# Altium PCB RiskChemi_Sensors_V2.11.PcbDoc
Units mil, origin at the board's own origin, x right, y up, seen from the top; angles counter-clockwise.
Board outline 6000 x 4000 mil, 2 copper layers (Top Layer, Bottom Layer); 85 components, 52 nets, 284 pads, 679 vias.
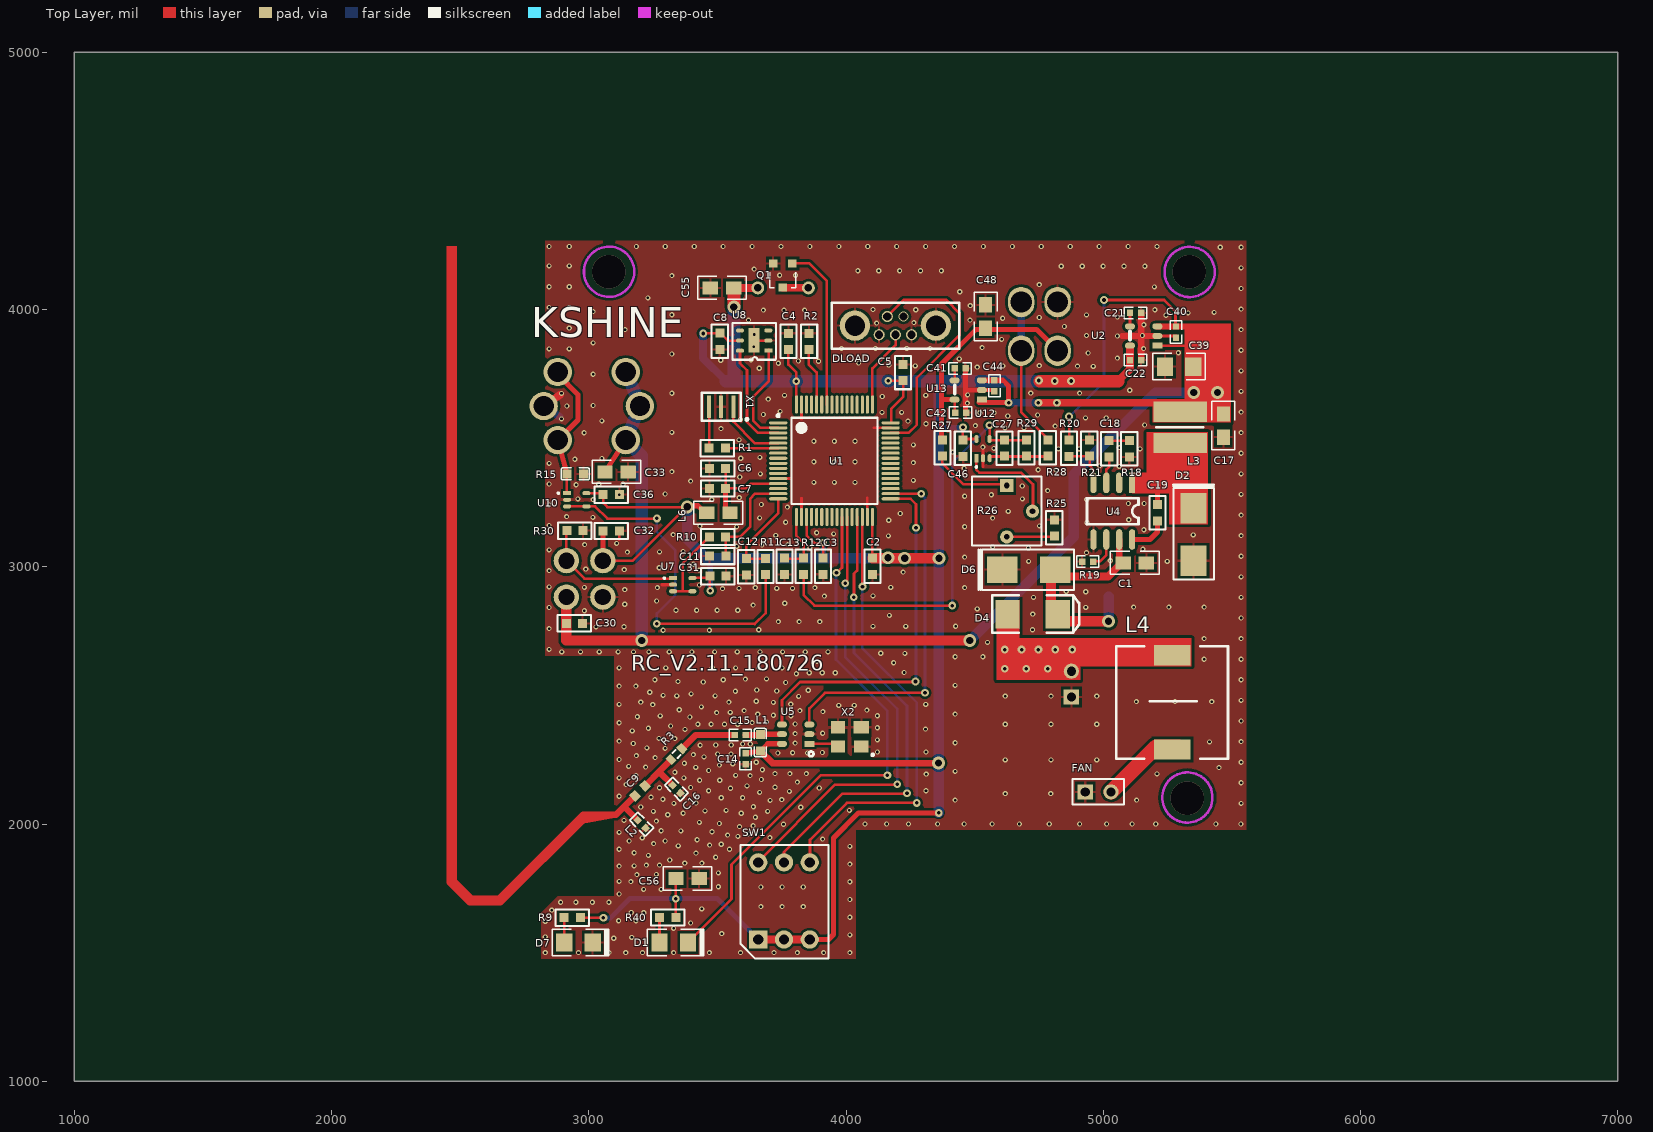
[diagram p0: Top Layer view]
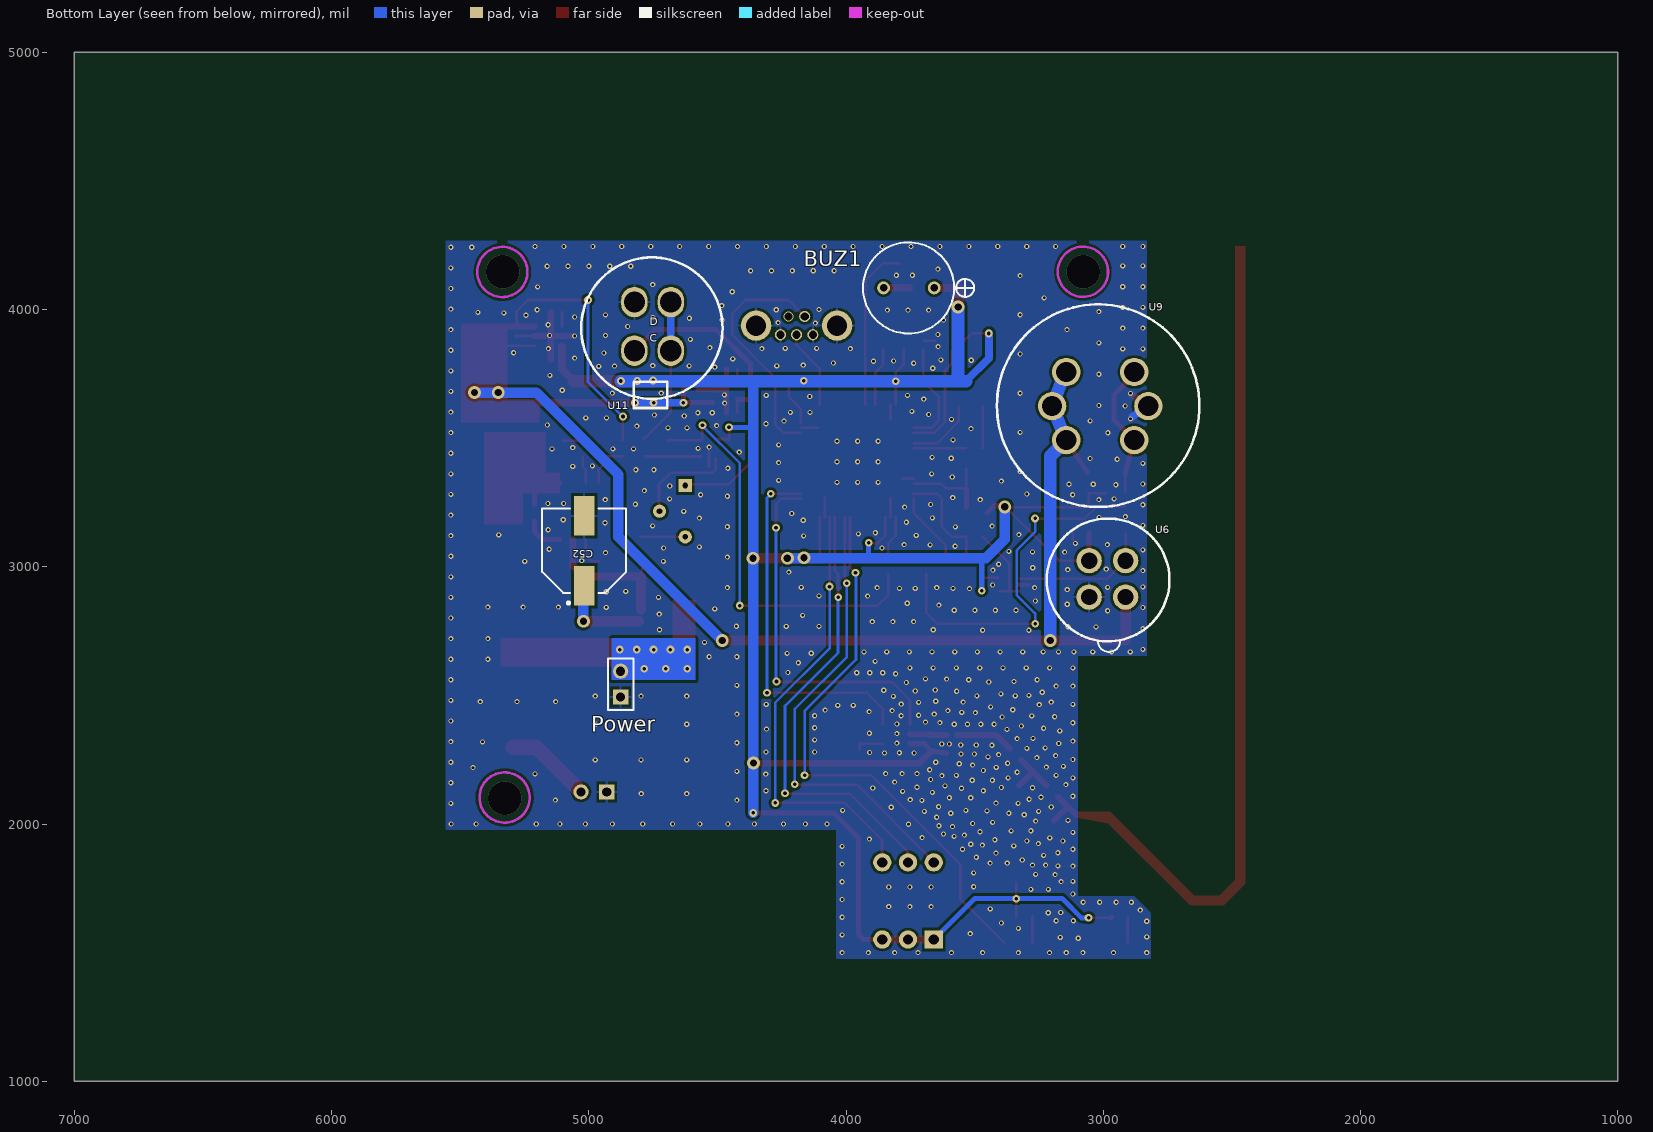
[diagram p1: Bottom Layer view, seen from below]

## Layer stack, top to bottom
Top Solder: solder mask 0.4, Solder Resist, Dk 3.5
Top Layer: signal copper 1.4
Dielectric 1: dielectric 12.6, FR-4, Dk 4.8
Bottom Layer: signal copper 1.4
Bottom Solder: solder mask 0.4, Solder Resist, Dk 3.5

## Board outline
1000,1000 7000,1000 7000,5000 1000,5000

## Design rules (kind name [scope] priority, off if disabled: settings)
Clearance [All] p1: gap=3
ComponentClearance [All] p1: gap=0 collisioncheckmode=3 verticalgap=0 showdistances=FALSE
MinimumSolderMaskSliver [All] p1 off: minsoldermaskwidth=10
PolygonConnect PolygonConnect_1 [IsVia] p1: connectstyle=Direct reliefconductorwidth=10 reliefentries=2 polygonreliefangle="90 Angle" airgapwidth=10
PolygonConnect [All] p2: connectstyle=Relief reliefconductorwidth=10 reliefentries=4 polygonreliefangle="90 Angle" airgapwidth=10
RoutingVias [All] p1: holewidth=28 width=50 viastyle="Through Hole" minholewidth=28 minwidth=50 maxholewidth=28 maxwidth=50
SilkToSilkClearance [All] p1 off: silktosilkclearance=10
SilkToSolderMaskClearance [IsPad] p1 off: minsilkscreentomaskgap=10 clearancetoexposedcopper=TRUE
SolderMaskExpansion [All] p1: expansion=4
Width [All] p1: maxlimit=100 minlimit=10 preferedwidth=10
26 further rules are at their usual default settings.

## Components (designator, comment, footprint, x,y, rotation, side; value= is the part's Value field where it differs from the comment)
BUZ1 "BUZZER 0905 through hole" BUZ0905 3755,4084 r180 bottom
C1 "10uF" 0805 5078,3015 r0 top
C2 "100nF" 0603 4099,3063 r0 top
C3 "100nF" 0603 3906,3063 r0 top
C4 "100nF" 0603 3781,3815 r180 top
C5 "100nF" 0603 4226,3694 r180 top
C6 "100nF" 0603 3562,3386 r270 top
C7 "1uF" 0603 3562,3309 r270 top
C8 "100nF" 0603 3505,3938 r0 top
C9 "0.8pF/25V" 1608[0603] 3199,2129 r225 top
C11 "100nF" 0603 3440,3037 r90 top
C12 "100nF" 0603 3608,3061 r0 top
C13 "100nF" 0603 3757,3063 r0 top
C14 "100nF" 0402#1 3606,2360 r0 top
C15 "82pF" 0402#1 3483,2342 r90 top
C16 "0.3pF/25V" 0402#1 3263,2208 r45 top
C17 "22uF" 0805 5467,3594 r270 top
C18 "150pF" 0603 5019,3520 r0 top
C19 "100nF" 0603 5207,3271 r0 top
C21 "NULL" 0402#1 5019,3983 r90 top
C22 "1uF" 0402#1 5019,3799 r90 top
C27 "1uF" 0603 4620,3399.95 r180 top
C30 "1uF" 0603 2883,2776 r90 top
C31 "100nF" 0603 3441,2959 r90 top
C32 "100nF" 0603 3026,3135 r90 top
C33 "10uF" 0805 3063,3369 r0 top
C36 "100nF" 0603 3026,3276 r90 top
C39 "22uF" 1206 5350,3778 r180 top
C40 "100nF" 0402#1 5279,4019 r0 top
C41 "22nF" 0402#1 4337,3767 r90 top
C42 "1uF" 0402#1 4339,3595 r90 top
C44 "100nF" 0402#1 4573,3810 r0 top
C46 "100nF" 0603 4450,3522 r0 top
C48 "10uF" 0805 4543,3928 r90 top
C52 "47uF" cap_pol_8*10.2 5018,3062 r90 bottom
C55 "10uF" 0805 3563,4084 r180 top
C56 "10uF" 0805 3339,1788 r0 top
D1 "LED" 1206_LED 3328,1542 r0 top
D2 "B290-13-F" B290 5351,3228 r270 top
D4 "1N4007" 6032_pol 4728,2814 r180 top
D6 "SMAJ36CA" B290 4608,2989 r0 top
D7 "LED_POWER" 1206_LED 2958,1542 r0 top
DLOAD "USB Connector" Mini_USB 4192,3902 r90 top
FAN "Header 2" HDR1X2 4930,2125 r0 top
L1 "100nH" 0603C 3668,2318 r0 top
L2 "Inductor" 0402#2 3206,1999 r45 top
L3 "15uH" "4*4 Inductor" 5291,3542 r180 top
L4 "22uH" 10*10Inductor 5269,2290 r0 top
L6 "10uH" 0805 3549,3210 r180 top
Power "Header 2" HDR1X2 4876,2494 r90 bottom
Q1 "2N7002" 2N7002 3756,4133 r180 top
R1 "100R" 0603 3561,3465 r270 top
R2 "10K" 0603 3861,3815 r180 top
R3 "0R" J1-0603 3341,2272 r225 top
R9 "510R" 0603 2997,1640 r270 top
R10 "1M" 0603 3562,3120 r270 top
R11 "1M" 0603 3683,3062 r0 top
R12 "1M" 0603 3831,3063 r0 top
R15 "Res1" 0603C 2946,3362 r90 top
R18 "100k" 0603 5097,3520 r0 top
R19 "200K" 0402#1 5046,3024 r270 top
R20 "205K" 0603 4863,3522 r0 top
R21 "40.2K" 0603 4950,3400 r180 top
R25 "5.1K" 0603 4814,3090 r180 top
R26 "3362P_2K_adj_res" res_adj 4625,3316 r0 top
R27 "5.1K" 0603 4371,3523 r0 top
R28 "1K" 0603 4789,3401 r180 top
R29 "100K" 0603 4697,3523 r0 top
R30 "10K" 0603 2885,3136 r90 top
R40 "510R" 0603 3368,1641 r270 top
SW1 "HRO韩国韩荣拨码开关" SW_6P_HRO 3659,1551 r90 top
U1 "STM32F103RBT6" LQFP64_N 3955,3412 r0 top
U2 "RT9013-33GB" SOT-23-5 5163,3899 r90 top
U4 "MP2565DN" so-8 5112,3326 r270 top
U5 "CMT2119A" SOT23-6 3810,2351 r90 top
U6 "TGS2602" "Gas Sensor TGS2602 Slot" 2913,2882 r0 bottom
U7 "LMV321SQ3T2G" SC-70-5 3328,2956 r0 top
U8 "SHT20" SHT20 3698,3840 r180 top
U9 "Gas Sensor 2M010" "Gas Sensor 2M010 Slot" 3144,3757 r180 bottom
U10 "LMV321SQ3T2G" SC-70-5 2916,3286 r0 top
U11 "WS101" Gas_Sensor_WS101_Slot 4752.45,3921 r180 bottom
U12 "LMV321SQ3T2G" SC-70-5 4507,3422 r90 top
U13 "RT9193-30GB" SOT-23-5 4481,3689 r90 top
X1 "8M smd" 8Mhz_XTAL 3562,3622 r180 top
X2 "XTAL_Negative" XTAL3225 3969,2376 r0 top

## Footprints (in the part's own frame and the unit in brackets; to place one, negate y for a bottom-side part, rotate by r counter-clockwise, add the part's x,y. Pads: shape width x height; smd on the part's side, far side on the other; paste and mask are expansions set on the pad)
2N7002 [mm]
  rect 0.85x0.8 smd: 1(0.047,1.221) 2(-0.903,-1.179) 3(0.997,-1.179)
  silkscreen extent -1.23,-0.28 1.32,1.22
"4*4 Inductor" [mm]
  rect 5.3x2 smd: 1(-0.203,-1.548) 2(-0.203,1.552)
  silkscreen extent -2.46,0 2.13,0
8Mhz_XTAL [mm]
  rect 0.4x2.2 smd: 1(0,0) 2(1.2,0) 3(2.4,0)
  silkscreen extent -1.45,-1.39 3.13,1.4
10*10Inductor [mm]
  rect 3.6x2 smd: 1(0,0) 2(0,9.3)
  silkscreen extent -5.55,-0.92 5.49,10.19
0402#1 [mil]
  rect 25x25 smd: 1(3.98,-127.99) 2(3.98,-84.98)
  silkscreen extent -19,-150 26,-63
0402#2 [mil]
  rect 25x25 smd: 1(-0.02,-20.99) 2(-0.02,22.02)
  silkscreen extent -23,-43 22,44
0603 [mil]
  rect 35x35 smd: 1(4.25,-92.76) 2(4.25,-29.76)
  silkscreen extent -27,-126 36,4
0603C [mil]
  rect 35x35 smd: 1(-0.83,30.88) 2(-0.83,-34.12)
  silkscreen extent -24,-57 23,54
0805 [mil]
  rect 60x50 smd: 1(90,0) 2(0,0)
  silkscreen extent -50,-45 140,45
1206 [mm]
  rect 1.6x1.8 smd: 1(0,0) 2(2.8,0)
  silkscreen extent -1.2,-1.3 4,1.3
1206_LED [mm]
  rect 1.6x1.8 smd: 1(-1.344,-0.081) 2(1.456,-0.081)
  silkscreen extent -2.54,-1.38 2.98,1.22
1608[0603] [mm] "Chip Capacitor, Body 1.6x0.8mm, IPC High Density"
  rect 0.8x0.9 smd: 1(-0.7,0) 2(0.7,0)
  body extent -0.87,-0.47 0.87,0.47, height 1.3
6032_pol [mm]
  rect 2.4x2.8 smd: 1(2.538,-0.041) 2(-2.422,-0.041)
  silkscreen extent -4.52,-1.89 4.06,1.81
B290 [mm]
  rect 3x2.6 smd: 1(5.2,0) 2(0,0)
  silkscreen extent -2.34,-2 7.06,2
BUZ0905 [mm] "Buzzer"
  round 1.27 hole 0.75: 1(2.485,0.002) 2(-2.515,0.002)
  silkscreen extent -4.55,-4.5 6.43,4.5
cap_pol_8*10.2 [mm]
  rect 3.9x2.05 smd: 1(-3.443,-0.001) 2(3.457,-0.001)
  silkscreen extent -5.27,-4.15 4.16,4.15
"Gas Sensor 2M010 Slot" [mm]
  round 2.8 hole 2: 1(0,0) 2(-1.391,-3.36) 3(0,-6.719) 4(6.719,-6.719) 5(8.109,-3.36) 6(6.719,0)
  silkscreen extent -6.84,-13.32 13.16,6.68
"Gas Sensor TGS2602 Slot" [mm]
  round 2.5 hole 1.6: 1(0,0) 2(0,-3.6) 3(3.6,-3.6) 4(3.6,0)
  silkscreen extent -4.33,-7.76 7.8,5.42
Gas_Sensor_WS101_Slot [mm]
  oval 2.6x3 hole 2.1: 1(-1.783,2.742) 2(-1.783,-2.058) 3(1.817,-2.058) 4(1.817,2.742)
  silkscreen extent -7.04,-7.72 6.93,7.16
HDR1X2 [mm] "Connector; Header; 2 Position"
  rect 1.5x1.5 hole 0.9: 1(0,0)
  round 1.5 hole 0.9: 2(2.54,0)
  silkscreen extent -1.27,-1.27 3.81,1.27
J1-0603 [mm] "Chip Resistor, Body 1.6x0.8mm, IPC High Density"
  rect 0.7x0.9 smd: 1(-0.75,0) 2(0.75,0)
  silkscreen extent -0.2,-0.35 0.2,0.35, body extent -0.85,-0.47 0.85,0.47, height 0.9
LQFP64_N [mm] "Thin QFP, 64-Leads, Body 10x10mm, Pitch 0.5mm, IPC Medium Density"
  oval 1.8x0.3 smd: 1(-5.55,3.75) 2(-5.55,3.25) 3(-5.55,2.75) 4(-5.55,2.25) 5(-5.55,1.75) 6(-5.55,1.25) 7(-5.55,0.75) 8(-5.55,0.25) 9(-5.55,-0.25) 10(-5.55,-0.75) 11(-5.55,-1.25) 12(-5.55,-1.75) 13(-5.55,-2.25) 14(-5.55,-2.75) 15(-5.55,-3.25) 16(-5.55,-3.75) 33(5.55,-3.75) 34(5.55,-3.25) 35(5.55,-2.75) 36(5.55,-2.25) 37(5.55,-1.75) 38(5.55,-1.25) 39(5.55,-0.75) 40(5.55,-0.25) 41(5.55,0.25) 42(5.55,0.75) 43(5.55,1.25) 44(5.55,1.75) 45(5.55,2.25) 46(5.55,2.75) 47(5.55,3.25) 48(5.55,3.75)
  oval 0.3x1.8 smd: 17(-3.75,-5.55) 18(-3.25,-5.55) 19(-2.75,-5.55) 20(-2.25,-5.55) 21(-1.75,-5.55) 22(-1.25,-5.55) 23(-0.75,-5.55) 24(-0.25,-5.55) 25(0.25,-5.55) 26(0.75,-5.55) 27(1.25,-5.55) 28(1.75,-5.55) 29(2.25,-5.55) 30(2.75,-5.55) 31(3.25,-5.55) 32(3.75,-5.55) 49(3.75,5.55) 50(3.25,5.55) 51(2.75,5.55) 52(2.25,5.55) 53(1.75,5.55) 54(1.25,5.55) 55(0.75,5.55) 56(0.25,5.55) 57(-0.25,5.55) 58(-0.75,5.55) 59(-1.25,5.55) 60(-1.75,5.55) 61(-2.25,5.55) 62(-2.75,5.55) 63(-3.25,5.55) 64(-3.75,5.55)
  silkscreen extent -5.67,-4.25 4.25,4.57, body extent -5,-5 5,5, height 1.6
Mini_USB [mm] "180 degree"
  round 1.1 hole 0.8: 1(0,-1.6) 3(0,0) 4(1.8,0.8) 5(0,1.6)
  round 1 hole 0.8: 2(1.8,-0.8)
  round 3 hole 2: 6(0.9,4) 7(0.9,-4)
  silkscreen extent -1.39,-6.32 3.15,6.3
res_adj [mm]
  rect 1.3x1.3 hole 0.55: 1(0,0)
  round 1.3 hole 0.55: 2(2.54,-2.54) 3(0,-5.08)
  silkscreen extent -3.44,-5.95 3.45,0.9
SC-70-5 [mm]
  rect 0.8x0.4 smd: 1(0,0)
  oval 0.8x0.4 smd: 2(0,-0.65) 3(0,-1.3) 4(1.9,-1.3) 5(1.9,0)
  silkscreen extent -0.91,-0.05 -0.81,0.05
SHT20 [mm]
  rect 0.8x0.4 smd: 1(0,0)
  oval 0.8x0.4 smd: 2(0,-1) 3(0,-2) 4(2.8,-2) 5(2.8,-1) 6(2.8,0)
  rect 1.1x2.4 smd: 2(1.402,-1.019)
  silkscreen extent -0.75,-2.72 3.53,0.89
so-8 [mil]
  rect 80x24 smd: 1(0,0)
  oval 80x24 smd: 2(0,-50) 3(0,-100) 4(0,-150) 5(220,-150) 6(220,-100) 7(220,-50) 8(220,0)
  silkscreen extent 60,-175 160,25
SOT23-6 [mm]
  rect 0.6x1 smd: 1(-0.998,-1.204)
  oval 0.6x1 smd: 2(-0.048,-1.204) 3(0.902,-1.204) 4(0.902,1.496) 5(-0.048,1.496) 6(-0.998,1.496)
  silkscreen extent -2.23,-1.62 -1.76,-1.14, body extent -1.5,-1.3 1.4,1.5, height 1.2
SOT-23-5 [mm]
  rect 0.6x1 smd: 1(-0.995,-1.201)
  oval 0.6x1 smd: 2(-0.045,-1.201) 3(0.905,-1.201) 4(0.905,1.499) 5(-0.995,1.499)
  silkscreen extent -0.4,1.5 0.4,1.5, body extent -1.5,-1.3 1.4,1.5, height 1.2
SW_6P_HRO [mm]
  rect 1.8x1.8 hole 1: 1(0,0)
  round 1.8 hole 1: 2(0,-2.54) 3(0,-5.08) 4(7.62,-5.08) 5(7.62,-2.54) 6(7.62,0)
  silkscreen extent -1.89,-6.93 9.34,1.74
XTAL3225 [mm]
  rect 1.4x1.2 smd: 1(0,-1.9) 2(2.3,-1.9) 4(0,0)
  rect 1.5x1.2 smd: 3(2.3,0)
  silkscreen extent 3.32,-2.82 3.52,-2.62

## Part data
BUZ1: library part BUZZER, "Buzzer"
C1 C17: library part Cap, "Capacitor,50V"
C2 C3 C4 C5 C6 C7 C8 C11 C12 C13 C14 C15 C16 C18 C19 C21 C22 C27 C30 C31 C32 C33 C36 C39 C40 C41 C42 C44 C46 C48 C55 C56: library part Cap, "Capacitor"
C9: library part "Cap Semi", "Capacitor (Semiconductor SIM Model)"
C52: library part "Cap Pol1", "Polarized Capacitor (Radial)"
D1 D7: library part LED0, "Typical INFRARED GaAs LED"
D2: library part Diode, "Default Diode"
D4 D6: library part "Diode 1N4007", "1 Amp General Purpose Rectifier"
DLOAD: library part Component_1
FAN Power: "Header, 2-Pin"
L1 L6: library part Inductor, "Inductor"
L3 L4: library part Inductor, "Inductor, 1A"
Q1: library part N-MOSFET
R1 R2 R9 R10 R11 R12 R18 R19 R20 R21 R25 R27 R28 R29 R30 R40: library part Res1, "Resistor"
R3: library part Res3, "Resistor"
R15: "Resistor"
R26: library part res_adj
SW1: library part SW_6P
U1: library part STM32F103R8T6, "STM32 ARM-based 32-bit MCU with 64 Kbytes Flash, 64-pin LQFP, Industrial Temperature"
U2 U13: library part RT9193
U4: library part MP1584, "DCDC 4.5V~28V input 1.8V ~5V output low power"
U6: "VOC sensor"
U9: library part "Gas Sensor"
U11: library part "Gas Sensor_WS101"

## Via types
v1: diameter 20, hole 10, Top Layer to Bottom Layer, tented both sides, 624 vias
v2: diameter 30, hole 14, Top Layer to Bottom Layer, 41 vias
v3: diameter 50, hole 28, Top Layer to Bottom Layer, 11 vias
v4: diameter 129.92, hole 129.92, Top Layer to Bottom Layer, 3 vias

## Nets (pads, with @x,y where several pads share a name; then routed paths per layer and width w, separated by ;. In a path a pad name is that pad's centre, name@x,y a point inside that pad or via, vN(x,y) a via of type N, cw(c..) or ccw(c..) an arc to the next point about the centre after c; other vN are vias at no path point)
24V: C1.2 C52.1 D4.2 D6.1 U4.7 | length 845.6
  Top Layer w10: D6.1@4794.72,2962 D6.1@4794.72,2990
  Top Layer w25: C1.2@5062,3002 U4.7
  Top Layer w30: D6.1@4794.72,2962 5019,2962 C1.2@5061,3004
  Top Layer w40: D4.2@4796.72,2831.72 D6.1@4796.72,2962 ; D4.2@4806,2788.63 v3@5009.63,2788.63
  Bottom Layer w40: v3(5021,2788) C52.1@5021,2884
A5V0: C17.2 C30.2 C33.2 C39.1 C40.2 C44.2 L3.1 R20.2 U2.1 U2.3 U6.1 U9.1 U9.2 U9.3 U13.1 U13.3 | length 6640.8
  Top Layer w10: R20.2 v2@4867.25,3585.25 ; v2(5003,4037) 5237,4037 5281,3993 C40.2@5281,3931 ; U2.1 5332,3859.83
  Top Layer w20: C33.2 3143.77,3492.64 U9.3@3144,3493 ; 4518,3638 v2(4632,3638) 4632,3704 4611,3725 U13.3@4528,3725
  Top Layer w24: U2.3@5210,3934 5331,3934
  Top Layer w30: v2(4748,3638) v2(4820,3638) L3.1@5219,3638
  Top Layer w40: U6.1 2913,2713 v3@4486,2713
  Bottom Layer w10: v2@4871,3587 5003,3719 v2@5003,4036
  Bottom Layer w30: v2@4631,3638 v2(4632,3638) v2(4748,3638) v2(4820,3638)
  Bottom Layer w40: v3@4478,2709 4885,3116 4885,3359 5203,3677 5443,3677 v3@5444,3676
  Bottom Layer w50: U9.3 3198.86,3624.67 3199,3625 3146.07,3757.82 U9.1@3146,3758 ; U9.3@3144.5,3491.5 3206,3430 v3(3206,2713)
  other v2: 4867,3584
  other v3: 4481,2713 5352,3677 5444,3677
ADC_IN1: R10.1 U7.3 U7.4 | length 321.4
  Top Layer w10: U7.3 U7.4 ; 3366,2906 3366,3008 ; 3366,3014 R10.1@3468.24,3116.24
ADC_IN2: R11.1 U10.3 U10.4 | length 1426.1
  Top Layer w10: U10.3 U10.4 3024.18,3234.82 3072,3187 v2@3260,3187 ; v2(3264,2778) 3644,2778 3645,2777 3688,2820 R11.1@3688,2972
  Bottom Layer w10: v2@3264,3187 v2(3265,3188) 3265,3136 3337,3064 3337,2891 3265,2819 v2@3265,2781
ADC_IN3: C27.1 R12.1 R29.2 U12.4 | length 1622.6
  Top Layer w10: R12.1 3835.25,2890.75 3877,2849 v2@4414,2849 ; U12.4 v2@4558.18,3548.82 ; U12.4@4559.76,3491.76 R29.2@4695.76,3491.76
  Bottom Layer w10: v2(4413,2849) 4413,3403 v2@4558,3548
  other v2: 4558,3550
BUZZER: Q1.2 U1.58 | length 641.9
  Top Layer w10: Q1.2@3793,4180 3857,4180 3925.47,4111.53 U1.58
CLK: U1.33 U5.4 | length 1440.2
  Top Layer w10: U5.4 3751.1,2481.1 3822,2552 v2@4271,2552 ; U1.33 4250.64,3264.36 4272,3243 v2(4272,3152)
  Bottom Layer w10: v2@4272,2556 v2@4272,3154
  other v2: 4270,2554
D3V0: C42.2 C48.2 R27.2 U11.2 U13.5 | length 933.1
  Top Layer w10: C42.2@4421.98,3598.98 U13.5
  Top Layer w20: R27.2@4371,3493 4371,3788 4506,3923 4741,3923 U11.2@4822,3842 ; 4375.17,3649.83 U13.5
D3V3: BUZ1.1 C2.2 C3.2 C4.2 C5.2 C8.2 C14.2 C22.2 C31.2 C32.2 C36.2 C46.2 C55.2 C56.2 L1.2 L6.1 R9.2 R40.2 SW1.1 SW1.2 SW1.3 U1.19 U1.32 U1.48 U1.64 U2.5 U5.6 U6.3 U7.5 U8.5 U10.5 U12.5 | length 10793.2
  Top Layer w10: R9.2@2969,1635 v2(3057,1635) ; U10.5 C36.2@3056,3286 ; U6.3 3171.73,3023.73 3380,3232 3072,3232 3056.76,3247.24 C36.2@3056.76,3286.25 ; v2(3338,1709) C56.2@3338,1771 ; R40.2 v2@3338.24,1708.24 ; U7.5@3407.8,2957 C31.2@3470.76,2957 ; v2@3444.76,3908.24 C8.2 ; L6.1@3452,3210 L6.1 ; v2@3470.76,2904.76 C31.2@3470.76,2966.25 ; C8.2@3520,3900 3541,3879 U8.5@3586,3879 ; C4.2@3776,3844 3776,3786 3807.36,3754.64 U1.64 ; U1.19 3846.73,3122.27 3877,3092 v2@3912,3092 ; C3.2@3911,3033 v2@3911,3091 ; C2.2@4102.64,3033 C2.2@4102.64,3033.24 ; U1.32 C2.2@4102.64,3033.24 ; C2.2 C2.2@4102.64,3033.24 ; v2@4166.76,3723.76 C5.2 4221.75,3660.75 4176,3615 U1.48@4176,3561 ; C46.2 v2@4454.25,3546.75 ; C46.2@4459.2,3496.8 U12.5
  Top Layer w20: R9.2@2967,1637 R9.2@2969,1635 ; U6.3 C32.2@3054.73,3133 ; v3@3384,3237 3425,3237 L6.1@3452,3210 ; C14.2 L1.2@3667,2284 ; L1.2@3669,2285 3695.71,2311.71 U5.6@3753,2311.71 ; SW1.3 3932,1551 3951,1570 3951,1946 4048,2043 v2@4355,2043
  Top Layer w25: L1.2 3714.05,2237 v3@4358,2237
  Top Layer w30: C55.2@3578.08,4084.08 BUZ1.1 ; SW1.1 SW1.2 SW1.3 ; 5057,3721 5103.98,3767.98 U2.5@5103.98,3857
  Top Layer w40: C2.2@4102.64,3033 v3(4362,3033)
  Top Layer w50: v3(3564,4010) C55.2@3564,4079 ; v2@4754,3721 5057,3721
  Bottom Layer w10: v2(3807,3721) 3807,3725 v2@3808,3726
  Bottom Layer w20: v2@3057,1634 3083.57,1634 3160.57,1711 3499,1711 SW1.1 ; v2(3472,2907) 3472,3027 ; 3912,3037 v2(3912,3093) ; 4382,3542 v2(4455,3542)
  Bottom Layer w30: v2@3444,3909 3444,3811 3534,3721
  Bottom Layer w40: v3(3383,3233) 3383,3107 3456.5,3033.5 3457,3034 3458,3033 v3(4228,3033) ; v2@4361,2044 4361,3714
  Bottom Layer w50: 3534,3721 3564,3721 ; v3@3564,4011 v3(3564,4010) 3564,3721 ; v2@4874,3721 v2(3807,3721) 3564,3721
  other v2: 4361,2043 4812,3722 4875,3722 4164,3723 4750,3724 3445,3907
  other v3: 4360,2237 4163,3035
DATA: U1.34 U5.3 | length 1436.3
  Top Layer w10: U5.3 3857.4,2449.4 3918,2510 v2@4306,2510 ; U1.34 v2(4293,3284)
  Bottom Layer w10: v2@4292,3283 4307,3268 v2@4307,2509
  other v2: 4307,2510
DGND: C1.1 C2.1 C3.1 C4.1 C5.1 C6.1 C7.1 C8.1 C11.2 C12.1 C13.1 C14.1 C16.1 C17.1 C21.1 C22.1 C30.1 C31.1 C32.1 C33.1 C36.1 C39.2 C40.1 C41.1 C42.1 C44.1 C46.1 C48.1 C52.2 C55.1 C56.1 D2.1 D6.2 D7.2 DLOAD.1 DLOAD.5 DLOAD.6 DLOAD.7 FAN.1 L2.1 Power.1 Q1.3 R2.1 R15.2 R18.1 R19.1 R21.1 R25.1 R30.1 U1.12 U1.18 U1.31 U1.47 U1.63 U2.2 U4.5 U5.2 U6.4 U7.2 U8.2 U9.5 U10.2 U11.1 U12.2 U13.2 X1.2 X2.2 X2.3 X2.4 | length 1331.4
  Top Layer w10: 3118.76,3105.24 C32.1 ; U8.2@3655.63,3879.37 U8.2@3698,3879.37 ; U1.12 3782.1,3343.1 ; U1.18 3827.05,3265.95 ; 3827.05,3572.95 U1.63 ; U1.31 4082.95,3268.95 ; 4108.95,3539.95 U1.47 ; 4532.59,3389 v1@4532.59,3457 ; U2.2 C40.1@5283.77,3897.23
  Top Layer w15: 3286,2930 U7.2 ; U13.2 C44.1@4577.23,3687.23
  Top Layer w20: C42.1@4464.99,3599.01 4464.99,3687.23 ; C41.1 4464.99,3687.23 ; U13.2 4464.99,3687.23
  Top Layer w25: 5073.77,3897.23 v1@5146.99,3897.23 ; C22.1@5146.99,3804 v1@5146.99,3897.23 ; C21.1 v1@5146.99,3897.23 ; U2.2 v1@5146.99,3897.23
  Top Layer w30: U9.5 v1@2888,3669
  Bottom Layer w30: U9.5 2887,3583
  other v1: 2831,1500 2960,1500 3079,1500 3144,1500 3209,1500 3330,1500 3469,1500 3590,1500 3720,1500 3811,1500 3913,1500 4015,1500 3097,1556 3167,1559 2831,1561 4015,1568.86 3517,1574 3330,1594 3396,1615 2831,1622 3116,1624 3183,1624 4015,1637.71 3214,1655 3165,1656 2856,1665 3439,1670 3669,1679 3751.5,1679 3834,1679 2890.5,1696 2950,1696 3014,1696 3078,1696 4015,1706.57 3118,1728 3213.33,1746 3281,1746 3669,1755 3751.5,1755 3834,1755 3504,1756 4015,1775.43 3164,1776 3118,1777 3187,1803 3263,1804 3504,1810 3118,1836.5 3176,1837 3224,1840 3275,1840 4015,1844.29 3373,1848 3440,1848 3315,1860 3493,1871 3232,1878 3417,1887 3176,1888 3118,1902 3547,1902 4015,1913.14 3348,1915 3470,1918 3515,1921 3252,1924 3157,1934 3297,1934 3421,1939 3909,1941 3208,1946 3704,1947 3580,1952 3540,1957 3621,1961 3118,1967.5 3479,1970 3358,1973 3281,1974 3586,1990 3639,1993 3757,1999 4074,2000 4158,2000 4243,2000 4356,2000 4459,2000 4568,2000 4674,2000 4790,2000 4908,2000 5013,2000 5112,2000 5204,2000 5438,2000 5535,2000 3508,2002 3430,2006 3263,2011 3137,2014 3648,2026 3307,2036 3367,2042 3593,2042 3251,2049 3695,2049 3452,2051 3534,2053 4013,2053 3824,2065 3202,2066 3640,2067 3331,2080 5536,2080.07 3417,2081 3705,2092 4424,2093 5130,2093 3750,2095 3288,2096 3515,2102 3598,2102 3242,2104 3118,2108 4619,2118 4796,2118 3664,2123 3780,2127 3466,2129 4311,2129 3551,2139 3896,2140 3275,2141 3396,2142 3724,2143 3615,2148 3145,2153 5536,2160.14 3811,2163 3431,2170 3509,2170 3671,2173 3118,2179.38 3370,2179 3627,2188 3183,2189 3571,2189 4312,2194 5209,2195 3724,2196 3782,2196 3846,2196 3335,2201 4424,2204.4 3466,2208 3675,2211 5450,2219 3416,2220 3221,2221 3155,2224 3508,2229 3560,2234 3372,2236 3651,2240 5536,2240.21 4619,2249 4797,2249 4975,2249 3118,2250.75 3258,2258 3448,2261 3185,2266 3407,2270 3501,2272 3553,2272 3735,2276 3850.33,2276 3792.67,2277 3908,2278 4122,2280 4311,2280 3297,2294 3226,2296 3433,2306 3493.5,2307 3554,2307 3598,2311 3628,2311 3173,2313 3802,2314.25 4424,2315.8 5413,2319 5536,2320.29 3118,2322.12 4122,2327 3335,2332 3273,2333 3802,2351.5 3909,2353 3169,2362 3374,2368 4309,2369 3232,2372 4122,2374 3318,2381 3424,2388 3475.8,2388 3527.6,2388 3579.4,2388 4619,2388 4797,2388 4975,2388 3802,2388.75 3118,2393.5 3635,2394 3691,2396 5536,2400.36 3393,2416 3189,2417 3278,2420 3786,2421 4122,2421 3718,2423 3657,2427 4424,2427.2 3497,2433 3550,2434 3910,2437 3604,2441 3821,2441 4081,2443 3352,2444 3438,2455 3972,2461 4032,2461 3249,2464 3118,2464.88 4310,2465 3785,2466 3718,2473 3202,2474 3545,2474 5129,2476 5279,2476 5422,2476 3651,2477 5536,2480.43 3816,2496 4619,2497 4797,2497 4975,2497 3342,2498 3491,2498 3289,2500 3398,2506 3237,2512 3570,2516 3731,2517 3853,2520 3653,2521 3118,2536.25 3183,2536 4424,2538.6 3765,2550 3445,2552 3347,2554 5536,2560.5 3257,2561 3523,2561 3609,2563 3691,2564 3807,2584 3857,2588 3907.5,2588 3958,2588 4226,2589 3118,2607 3208.56,2607 3299.11,2607 3389.67,2607 3480.22,2607 3570.78,2607 3661.33,2607 3751.89,2607 4185,2627 3887,2632 5392,2640.57 5536,2640.57 4424,2650 4532,2650 4229,2663 4135,2664 2895,2669 2968,2669 3041,2669 3114,2669 3174,2669 3234,2669 3312.92,2669 3401.08,2669 3489.23,2669 3577.38,2669 3665.54,2669 3753.69,2669 3841.85,2669 3930,2669 2846,2679 4550,2706 5392,2720.64 5536,2720.64 3289,2753 3469,2753 3661,2755 4725,2755 2846,2759.33 3028,2766 3137,2767 4105,2768 4232,2768 4426,2769 3737,2787 3817.5,2787 3898,2787 5536,2800.71 4168.5,2811 4726,2816 2983,2829 3339,2831 3419,2831 3499,2831 3579,2831 4510,2836 2846,2841.67 4932,2842 5118,2843 5255,2843 5392,2843 3639,2851 3140,2854 3762,2858 3264,2867 4729,2881 5536,2880.79 3916,2886 4105,2887 4932,2903 4856,2904 3140,2911 3520,2915 3584,2916 3731,2916 3792,2916 3267,2919 3647,2919 3879,2919 4461,2919 2983,2920 4174,2920 2846,2922 3430,2929 5536,2960.86 4222,2979 2846,2985.33 3429,2987 3138,2989 2988,2991 3274,2996 3407,3010 4710,3021 5249,3021 5027,3024 4461,3037.33 5536,3040.93 4935,3055 3150,3057 3275,3058 3367,3060 2846,3065.67 5154,3068 3860,3073 4709,3073 4570,3077 3576,3080 3673,3085 2984,3086 3774,3086 3108,3091 4165,3120 5536,3121 3727,3122 5350,3124 3328,3125 3952,3128 3886,3132 5158,3144 3575,3155 4461,3155.67 3432,3158 4752,3159 2846,3161 4937,3171 3765,3173 4166,3181 5099,3183 4570,3189 3664,3190 3016,3192 2914,3195 5536,3201.07 4211,3207 4631,3215 3772,3232 2846,3241.33 3671,3242 4819,3243 5098,3246 5159,3246 3017,3261 3478,3261 4936,3261 2958,3264 4686,3264 3585,3269 4461,3274 3119,3280 4565,3280 5536,3281.14 3297,3283 4784,3296 4685,3314 2951,3319 3039,3321 3133,3321 2846,3321.67 3875,3328 3955,3328 4035,3328 3396,3333 4262,3336 3587,3349 3667,3361 5536,3361.21 3323,3370 4747,3377 4817,3377 4459,3383 5062,3390 4986,3392 2846,3402 4262,3405 3875,3408 3955,3408 4035,3408 2946,3418 3051,3421 3591,3422 3665,3425 5536,3441.29 4415,3446 4826,3458 4906,3458 5143,3458 4575,3460 5062,3463 4532,3465 4262,3474 3875,3488 3955,3488 4035,3488 3584,3493 2982,3521 5536,3521.36 3323,3522.4 3514,3537 4618,3540 4692,3540 4813,3547 4503,3549 5161,3551 4311,3556 4241,3566 3051,3567 3590,3573 2894,3575 4931,3579 5012,3579 4629,3586 4745,3590 3679,3592 4520,3599 4576,3599 4140,3600 4216,3600 5536,3601.43 3744,3604 2915,3625 3017,3627 4472,3636 3698,3652 4141,3662 3761,3666 4310,3666 4473,3668 2894,3674 3323,3674.8 4718,3675 4908,3675 5536,3681.5 5103,3686 5151,3744 3017,3748.67 5536,3761.57 3663,3772 4510,3776 4961,3779 4900,3780 4269,3781 4610,3781 4751,3782 4166,3784 3737,3791 4049,3792 3893,3799 3815,3800 3513,3803 3631,3804 4440,3808 5055,3811 3323,3827.2 4941,3831 5292,3832 5536,3841.64 2846,3847 2924,3847 3983,3848 4327,3848 5157,3848 4114,3849 4236,3849 4529,3852 3642,3856 3017,3870.33 4605,3884 5055,3897 4935,3899 5152,3899 3643,3903 3141,3922 5536,3921.71 2846,3927.6 2924,3927.6 4849,3934 5158,3941 4119,3947 4264,3949 3621,3959 4482,3959 4609,3966 4751,3969 5055,3971 5244,3978 4935,3979 3323,3979.6 5330,3987 5431,3989 3017,3992 3679,3998 3759,3998 3839,3998 4271,3999 5201,3999 4105,4000 5536,4001.78 2846,4008.2 2924,4008.2 4483,4015 3230,4045 4442,4069 5536,4081.86 5199,4088 2846,4088.8 2924,4088.8 4751,4097 3323,4132 3742,4133 3804,4133 4046,4151 4127.25,4151 4208.5,4151 4289.75,4151 4371,4151 3643,4157 5536,4161.93 4837,4168 4918.25,4168 4999.5,4168 5080.75,4168 5162,4168 2846,4169.4 2924,4169.4 5455,4242 5536,4242 2846,4245 2924,4245 3185,4245 3297.44,4245 3409.89,4245 3522.33,4245 3634.78,4245 3747.22,4245 3859.67,4245 3972.11,4245 4084.56,4245 4197,4245 4309.44,4245 4421.89,4245 4534.33,4245 4646.78,4245 4759.22,4245 4871.67,4245 4984.11,4245 5096.55,4245 5209,4245
LED_STA: D1.2 U1.26 | length 2217.3
  Top Layer w10: D1.2 3555,1708.51 3555,1840 ; 3555,1842 3903,2190 v2(4161,2190) ; v2@3962,2974 3984.53,2996.53 U1.26
  Bottom Layer w10: v2@3961,2974 3961,2639 4161,2439 v2(4161,2190)
  other v2: 3963,2977
NetAnt._1: C9.2 L2.2 | length 3426.3
  Top Layer w25: 2978,2036 3106,2036 C9.2@3175,2105 ; 3140,2064.63 L2.2@3189.9,2014.73
  Top Layer w40: 2467,4227 2467,1775 2539,1703 2655,1703 2980.5,2028.5
NetBUZ1_2: BUZ1.2 Q1.1 | length 92.9
  Top Layer w30: Q1.1 BUZ1.2@3847.07,4084.93
NetC6_2: C6.2 C7.2 L6.2 U1.13 | length 359.2
  Top Layer w10: C7.2@3532,3306 3613,3306 3630.42,3323.42 U1.13 ; C7.2@3532.24,3308.76 C6.2
  Top Layer w20: L6.2@3532.24,3230.24 C7.2
NetC9_1: C9.1 C16.2 R3.2 | length 209.2
  Top Layer w25: C9.1@3221,2151 3275,2205 R3.2@3318,2248 ; 3275,2201.63 C16.2
NetC11_1: C11.1 R10.2 U1.15 | length 418.4
  Top Layer w10: R10.2@3532,3116 3588,3116 3627,3155 3627,3264 3647,3284 U1.15@3742,3284 ; C11.1@3532.24,3040.76 R10.2
NetC12_2: C12.2 R11.2 U1.16 | length 361.4
  Top Layer w10: C12.2 R11.2@3687.24,3031.24 ; C12.2@3618,3032 3612,3038 3612,3083 3736.5,3207.5 U1.16
NetC13_2: C13.2 R12.2 U1.17 | length 252.4
  Top Layer w10: C13.2@3757,3032 3758,3031 3835,3031 3835,3093 3807.36,3120.64 U1.17
NetC15_1: C15.1 L1.1 U5.5 | length 142.8
  Top Layer w20: L1.1 U5.5@3752,2348.88
  Top Layer w25: C15.1 L1.1@3668.98,2345.98
NetC15_2: C15.2 R3.1 | length 224.1
  Top Layer w25: R3.1@3364.25,2294.43 3415.91,2346.09 ; 3416,2346 C15.2@3567,2346
NetC18_1: C18.1 U4.3 | length 107
  Top Layer w10: U4.3 5012,3378 5024,3390 C18.1@5024,3428
NetC18_2: C18.2 R18.2 | length 78.1
  Top Layer w10: C18.2 5100.24,3490.24 R18.2@5101,3491
NetC19_1: C19.1 U4.8 | length 154.4
  Top Layer w20: U4.8 5182,3106 5211.25,3135.25 C19.1
NetC19_2: C19.2 D2.2 L3.2 U4.1 | length 164
  Top Layer w20: U4.1 5177,3326 5211.25,3291.75 C19.2
NetC21_2: C21.2 U2.4 | length 54.4
  Top Layer w10: U2.4 C21.2@5103.98,3989.02
NetC27_2: C27.2 R28.2 R29.1 U12.3 | length 210
  Top Layer w10: U12.3@4563.76,3428.76 4615.75,3428.76 4691,3428.76 R29.1@4691,3432 ; R29.1@4701.25,3428.76 R28.2@4780.76,3428.76
NetC41_2: C41.2 U13.4 | length 42.4
  Top Layer w10: U13.4 C41.2@4421.98,3766.98
NetD1_1: D1.1 R40.1 | length 102.2
  Top Layer w10: D1.1 R40.1@3275.08,1641
NetD4_1: D4.1 L4.2 Power.2
  other v2: 4617,2603 4700.49,2604 4783.98,2604 4617,2678 4682.5,2678 4748,2678 4813.5,2678 4879,2678
NetD7_1: D7.1 R9.1 | length 99.2
  Top Layer w10: D7.1 R9.1@2905.08,1638
NetFAN_2: FAN.2 L4.1 | length 334.1
  Top Layer w60: FAN.2@5031,2125 5205,2299 L4.1@5293,2299
NetR1_1: R1.1 X1.3 | length 161.4
  Top Layer w10: X1.3@3468,3622 3468,3460.99 R1.1
NetR1_2: R1.2 U1.6 | length 202.5
  Top Layer w10: R1.2@3534,3461.21 U1.6
NetR2_2: R2.2 U1.60 | length 225.4
  Top Layer w10: R2.2@3855,3843 3855,3787 3886.1,3755.9 U1.60
NetR15_1: R15.1 U9.4 U9.6 U10.1 | length 541.3
  Top Layer w10: U10.1@2915.12,3288.88 R15.1
  Top Layer w20: U9.4@2879,3494 2879.42,3492.47 R15.1 ; U9.4 2958,3571 2958,3669 2880,3747 U9.6@2880,3759
NetR19_2: R19.2 U4.6 | length 122.4
  Top Layer w10: R19.2@4960,3021 4987,3021 5012,3046 U4.6
NetR20_1: R20.1 R21.2 U4.4 | length 185.8
  Top Layer w10: R20.1@4866.76,3429.76 R21.2 ; R21.2@4948,3427 4948,3392 4962,3378 U4.4
NetR25_2: R25.2 R26.3 | length 172
  Top Layer w10: R26.3@4628,3116 R25.2@4800,3116
NetR26_1: R26.1 R27.1 | length 312
  Top Layer w10: R27.1@4375,3431 4375,3402 4457,3320 R26.1@4624,3320
NetR26_2: R26.2 U12.1 | length 393.6
  Top Layer w10: U12.1 4507,3377 4518,3366 4681,3366 4727,3320 R26.2@4727,3215
NetR28_1: R28.1 U11.3 U11.4 | length 571.6
  Top Layer w10: U11.3 4680.9,3602.1 R28.1@4786,3497
  Bottom Layer w30: U11.3@4680.9,3843.9 U11.4
NetU1_5: U1.5 X1.1 | length 264.9
  Top Layer w10: X1.1@3562,3620 3562,3564 3645.1,3480.9 U1.5
NetU5_1: U5.1 X2.1 | length 110.3
  Top Layer w10: U5.1 3947,2311.71 X2.1@3947,2291
SHT_SCL: U1.3 U8.6 | length 425.4
  Top Layer w10: U8.6@3588,3838 3588,3791 3615,3764 3615,3563 3657.73,3520.27 U1.3
SHT_SDA: U1.2 U8.1 | length 408.1
  Top Layer w10: U8.1@3699,3843 3699,3721 3640,3662 3640,3567 3667.05,3539.95 U1.2
SW1: SW1.6 U1.27 | length 1796.8
  Top Layer w10: SW1.6@3659,1855 3957,2153 v2@4201,2153 ; v2@3987,2938 3994,2938 4004.21,2948.21 U1.27
  Bottom Layer w10: v2@3997,2935 3997,2650 4199,2448 v2(4199,2154)
  other v2: 3997,2936
SW2: SW1.5 U1.29 | length 1772.1
  Top Layer w10: SW1.5@3759,1856 3759,1891 3986,2118 v2@4241,2118 ; v2@4031,2886 4031,2973 4043.58,2985.58 U1.29
  Bottom Layer w10: v2@4031,2882 4031,2665 4237,2459 v2(4237,2119)
  other v2: 4030,2882
SW3: SW1.4 U1.30 | length 1761.5
  Top Layer w10: SW1.4@3860,1849 3860,1938 4004,2082 v2@4274,2082 ; v2@4063.27,2923 U1.30
  Bottom Layer w10: v2(4064,2923) 4064,2683 4275,2472 v2(4275,2082)
SWCLK: DLOAD.3 U1.49 | length 309.9
  Top Layer w10: U1.49 4102.64,3771.64 4193,3862 DLOAD.3@4193,3903
SWDIO: DLOAD.4 U1.46 | length 946.9
  Top Layer w10: DLOAD.4@4160,3973 4224,4037 4390,4037 4442,3985 4442,3901 4275,3734 4275,3552 4243.27,3520.27 U1.46
VTEST: R30.2 U6.2 U7.1 | length 543.2
  Top Layer w10: R30.2@2913,3129 U6.2 2982.73,2954 U7.1@3322,2954
pads on no net: DLOAD.2 U1.1 U1.4 U1.7 U1.8 U1.9 U1.10 U1.11 U1.14 U1.20 U1.21 U1.22 U1.23 U1.24 U1.25 U1.28 U1.35 U1.36 U1.37 U1.38 U1.39 U1.40 U1.41 U1.42 U1.43 U1.44 U1.45 U1.50 U1.51 U1.52 U1.53 U1.54 U1.55 U1.56 U1.57 U1.59 U1.61 U1.62 U4.2 U8.3 U8.4
copper on no net:
  other v4: 5327,2100 3077,4147 5335,4147

## Polygon pours and split planes (outlines as drawn)
DGND on Top Layer "GND_L02_P-001" (solid, remove dead copper, pour order 18): 5556,4267 5556,1978 4038,1978 4038,1476 2700,1476 2416,1476 2416,4267 5556,4267
DGND on Bottom Layer "GND_L02_P-001" (solid, remove dead copper, pour order 20): 5556,4267 5556,1978 4038,1978 4038,1476 2700,1476 2427,1749 2427,1750 2427,4267 5556,4267

## Keep-outs
Keep-Out Layer:
  circle w10: c5327,2103 r97.62
  circle w10: c5336,4146 r97.62
  circle w10: c3079,4147 r97.62

## Other copper
Top Layer:
  rectangle net NetD4_1: 4909,2613 5344,2723
  rectangle net NetD4_1: 4585,2705 4675,2870
  rectangle net NetC19_2: 5112,3285 5198,3367
  rectangle net NetC19_2: 5168,3285 5408,3524
  region net NetD4_1: 4911,2559 4911,2723 4585,2723 4585,2559
  rectangle net A5V0: 5191,3560 5496,3653
  rectangle net NetC19_2: 5255,3165 5408,3291
  rectangle net A5V0: 5315,3638 5496,3946
  region net NetAnt._1: 2973.64,1999.52 3101.4,2023.55 3097.19,2045.92 2969.43,2021.89
  rectangle net NetAnt._1: 2447,4222 2487,4247
  pour cut-out: 3175,2144 3184,2153 3223,2114 3214,2105
  pour cut-out: 3317,2286 3327,2296 3366,2257 3356,2247
  pour cut-out: 3912,2521 3912,2538 4245,2538 4245,2521
  pour cut-out: 3100,1720 2815,1720 2815,1425 2410,1425 2410,4280 2830,4280 2830,2655 3100,2655
  pour cut-out: 2815,1720 2815,1655 2880,1720
Bottom Layer:
  rectangle net NetD4_1: 4585,2559 4911,2723
  pour cut-out: 2410,4280 2830,4280 2830,2655 3100,2655 3100,1720 2815,1720 2815,1425 2410,1425
  pour cut-out: 2815,1720 2815,1655 2880,1720

## Silkscreen, mask and mechanical layers (free items; w line width, h text height)
Top Overlay:
  text "KSHINE" at 2776,3854 h200
  text "RC_V2.11_180726" at 3166,2596 h60
Mechanical 1:
  lines w10: 4043,1973 4043,1471 2698,1471 2422,1750 2422,4272 5561,4272 5561,1973 4044,1973

## Dimensions
2206,4276 to 2201,1471 on Top Overlay
2422,4404 to 5562,4428 on Top Overlay

## Text inside footprints (layer, text, board x,y; h text height)
U11: Bottom Overlay "C" at 4763.02,3875.57 h30; Bottom Overlay "D" at 4762.52,3939.12 h30